# Altium PCB Tube_Driver.PcbDoc (part 1 of 2)
Units mm, origin at the board's own origin, x right, y up, seen from the top; angles counter-clockwise.
Board outline 113 x 87.5 mm, 2 copper layers (Top Layer, Bottom Layer); 135 components, 76 nets, 317 pads, 176 vias.
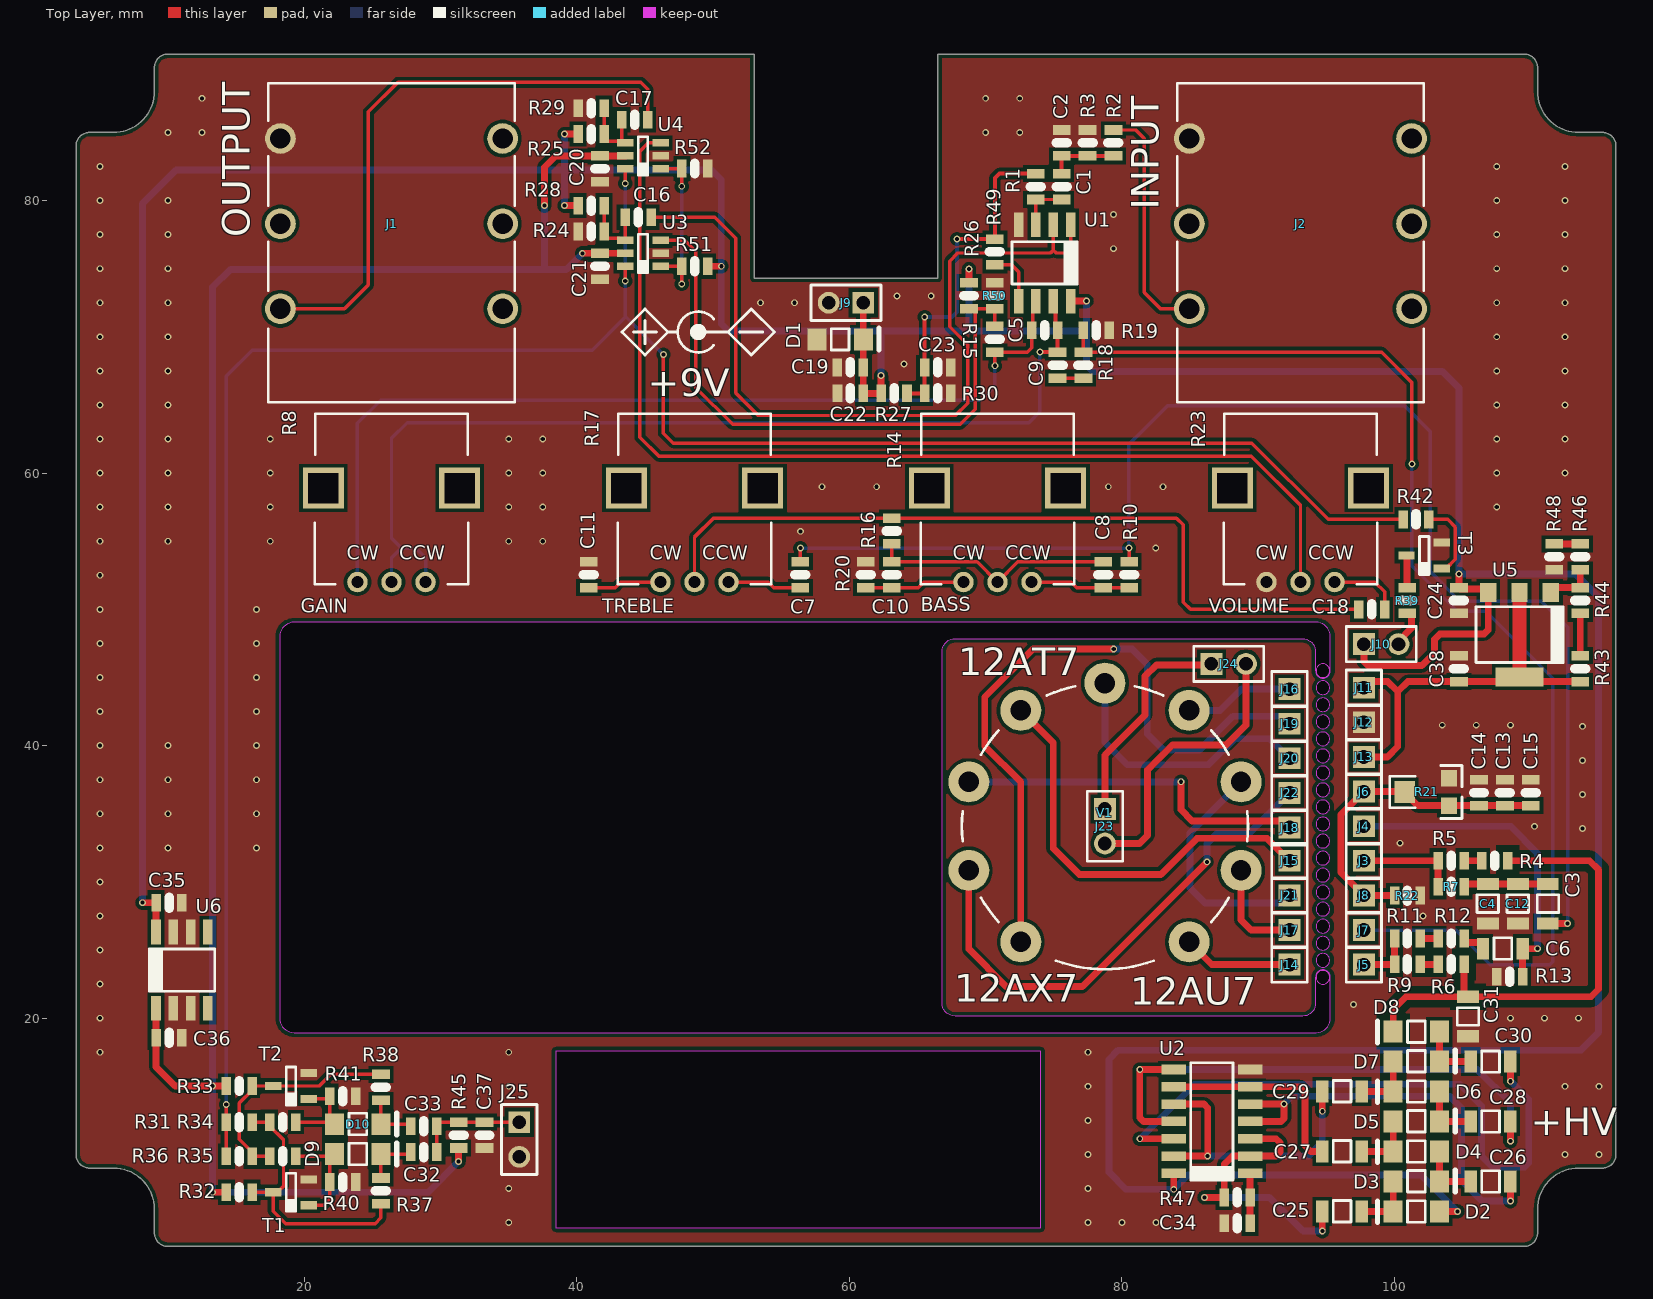
[diagram p0: Top Layer view]
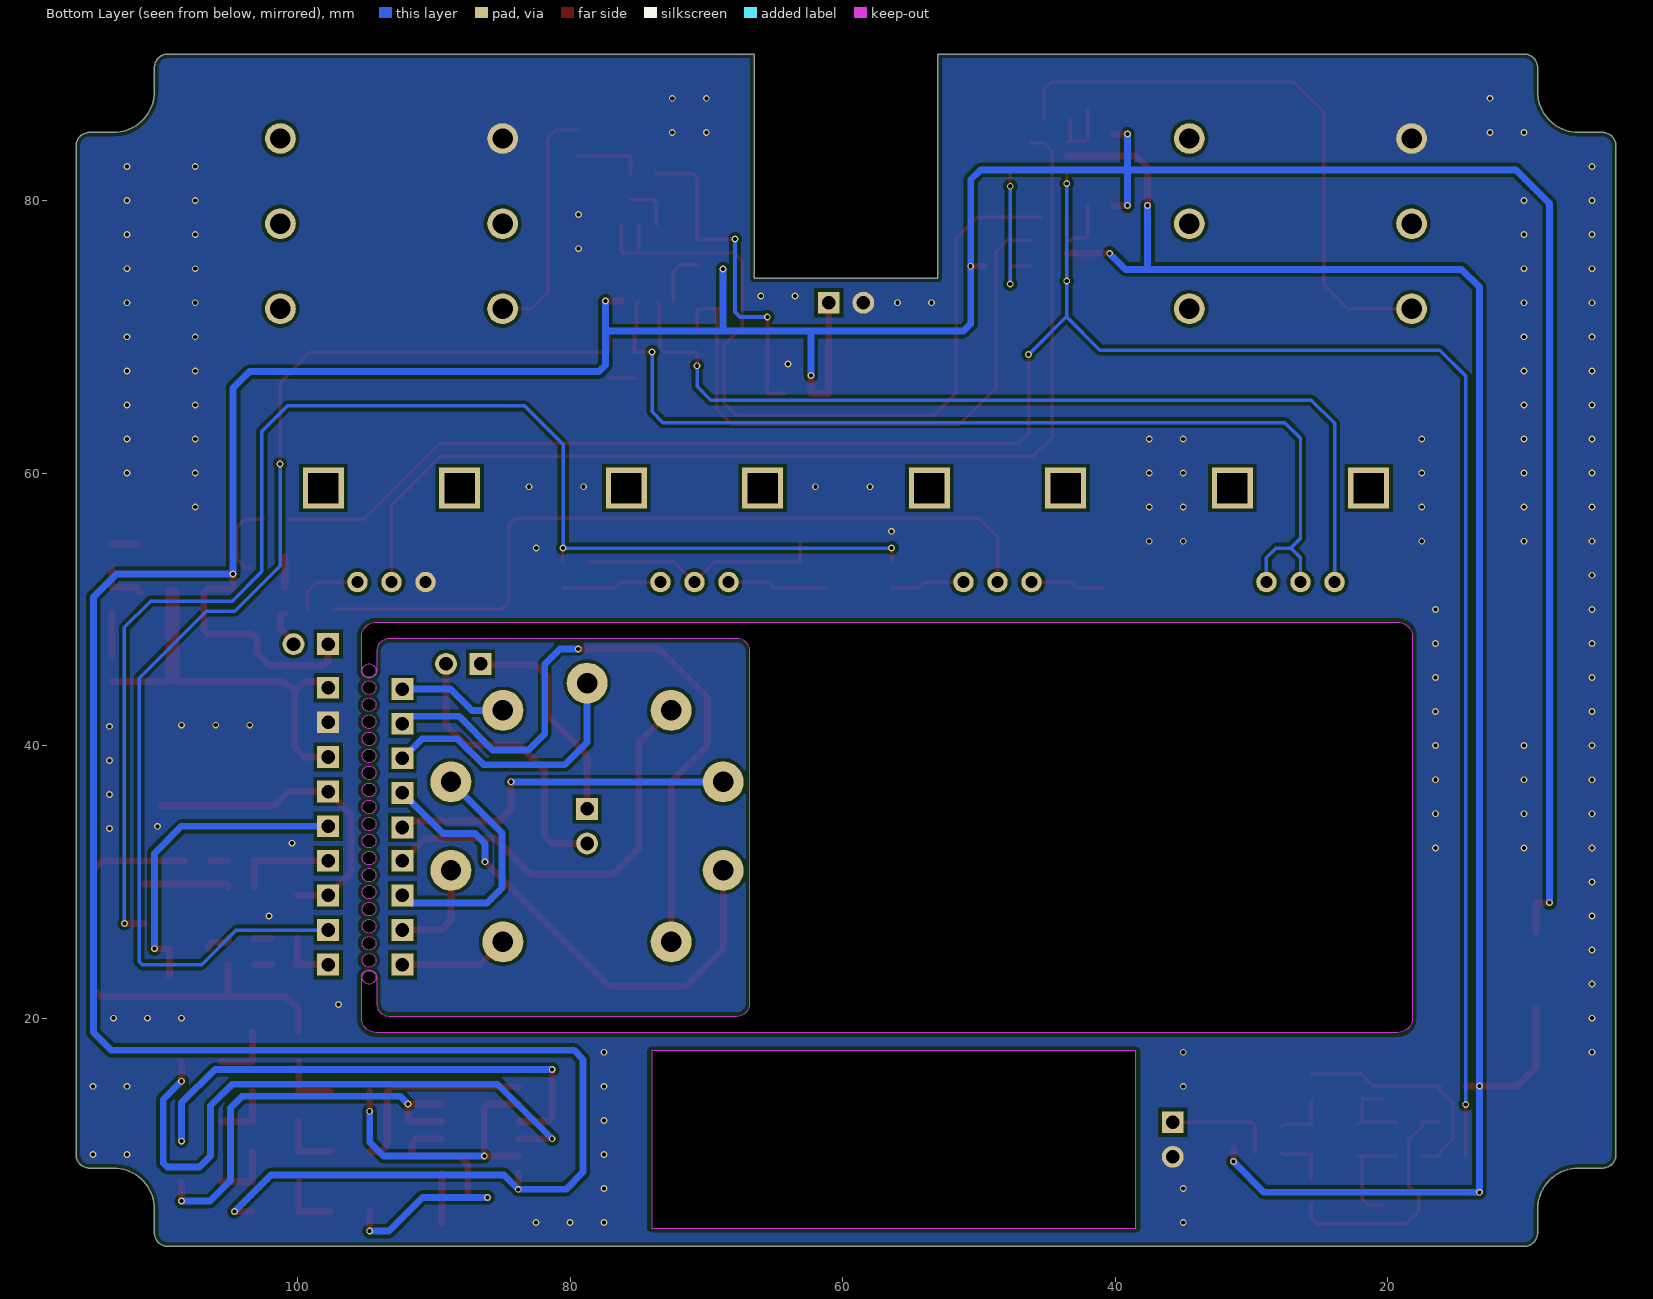
[diagram p1: Bottom Layer view, seen from below]

## Layer stack, top to bottom
Top Solder: solder mask 0.0102, Solder Resist, Dk 3.5
Top Layer: signal copper 0.0356
Dielectric 1: dielectric 0.32, FR-4, Dk 4.8
Bottom Layer: signal copper 0.0356
Bottom Solder: solder mask 0.0102, Solder Resist, Dk 3.5

## Board outline
4.25,8.999 6,9 cw(c6,6) 9,6 9,4.249 8.999,4.25 ccw(c9.999,4.25) 9.999,3.25 109.501,3.25 ccw(c109.501,4.25) 110.501,4.25 110.5,4.249 110.5,6 cw(c113.5,6) 113.5,9 115.251,9 115.25,8.999 ccw(c115.25,9.999) 116.25,9.999 116.25,84.001 ccw(c115.25,84.001) 115.25,85.001 115.251,85 113.5,85 cw(c113.5,88) 110.5,88 110.5,89.751 110.501,89.75 ccw(c109.501,89.75) 109.501,90.75 66.5,90.75 66.5,74.3 53,74.3 53,90.75 9.999,90.75 ccw(c9.999,89.75) 8.999,89.75 9,89.751 9,88 cw(c6,88) 6,85 4.249,85 4.25,85.001 ccw(c4.25,84.001) 3.25,84.001 3.25,9.999 ccw(c4.25,9.999)
cut-out: 18.2,19.999 ccw(c19.25,19.999) 19.25,18.949 19.251,18.949 94.25,18.949 ccw(c94.25,19.999) 95.3,19.999 95.3,23 ccw(c94.75,23) 94.75,23.55 ccw(c94.75,23) 94.2,23.001 94.2,23 94.2,21.1 cw(c93.25,21.1) 93.25,20.15 67.75,20.15 cw(c67.75,21.1) 66.8,21.1 66.8,46.9 cw(c67.75,46.9) 67.74,47.85 67.75,47.849 93.25,47.849 cw(c93.25,46.899) 94.2,46.899 94.2,45.5 94.2,45.499 ccw(c94.75,45.5) 94.75,44.95 ccw(c94.75,45.5) 95.296,45.429 95.3,45.45 95.3,47.999 ccw(c94.25,47.999) 94.25,49.049 19.25,49.049 19.249,49.049 ccw(c19.25,47.999) 18.2,47.999
cut-out: 94.25,23 ccw(c94.75,23) 94.75,22.5 ccw(c94.75,23) 95.25,23 ccw(c94.75,23) 94.75,23.5 ccw(c94.75,23)
cut-out: 94.25,24.25 ccw(c94.75,24.25) 94.75,23.75 ccw(c94.75,24.25) 95.25,24.25 ccw(c94.75,24.25) 94.75,24.75 ccw(c94.75,24.25)
cut-out: 94.25,25.5 ccw(c94.75,25.5) 94.75,25 ccw(c94.75,25.5) 95.25,25.5 ccw(c94.75,25.5) 94.75,26 ccw(c94.75,25.5)
cut-out: 94.25,26.75 ccw(c94.75,26.75) 94.75,26.25 ccw(c94.75,26.75) 95.25,26.75 ccw(c94.75,26.75) 94.75,27.25 ccw(c94.75,26.75)
cut-out: 94.25,28 ccw(c94.75,28) 94.75,27.5 ccw(c94.75,28) 95.25,28 ccw(c94.75,28) 94.75,28.5 ccw(c94.75,28)
cut-out: 94.25,29.25 ccw(c94.75,29.25) 94.75,28.75 ccw(c94.75,29.25) 95.25,29.25 ccw(c94.75,29.25) 94.75,29.75 ccw(c94.75,29.25)
cut-out: 94.25,31.75 ccw(c94.75,31.75) 94.75,31.25 ccw(c94.75,31.75) 95.25,31.75 ccw(c94.75,31.75) 94.75,32.25 ccw(c94.75,31.75)
cut-out: 94.25,33 ccw(c94.75,33) 94.75,32.5 ccw(c94.75,33) 95.25,33 ccw(c94.75,33) 94.75,33.5 ccw(c94.75,33)
cut-out: 94.25,34.25 ccw(c94.75,34.25) 94.75,33.75 ccw(c94.75,34.25) 95.25,34.25 ccw(c94.75,34.25) 94.75,34.75 ccw(c94.75,34.25)
cut-out: 94.25,35.5 ccw(c94.75,35.5) 94.75,35 ccw(c94.75,35.5) 95.25,35.5 ccw(c94.75,35.5) 94.75,36 ccw(c94.75,35.5)
cut-out: 94.25,36.75 ccw(c94.75,36.75) 94.75,36.25 ccw(c94.75,36.75) 95.25,36.75 ccw(c94.75,36.75) 94.75,37.25 ccw(c94.75,36.75)
cut-out: 94.25,38 ccw(c94.75,38) 94.75,37.5 ccw(c94.75,38) 95.25,38 ccw(c94.75,38) 94.75,38.5 ccw(c94.75,38)
cut-out: 94.25,39.25 ccw(c94.75,39.25) 94.75,38.75 ccw(c94.75,39.25) 95.25,39.25 ccw(c94.75,39.25) 94.75,39.75 ccw(c94.75,39.25)
cut-out: 94.25,40.5 ccw(c94.75,40.5) 94.75,40 ccw(c94.75,40.5) 95.25,40.5 ccw(c94.75,40.5) 94.75,41 ccw(c94.75,40.5)
cut-out: 94.25,41.75 ccw(c94.75,41.75) 94.75,41.25 ccw(c94.75,41.75) 95.25,41.75 ccw(c94.75,41.75) 94.75,42.25 ccw(c94.75,41.75)
cut-out: 94.25,43 ccw(c94.75,43) 94.75,42.5 ccw(c94.75,43) 95.25,43 ccw(c94.75,43) 94.75,43.5 ccw(c94.75,43)
cut-out: 94.25,44.25 ccw(c94.75,44.25) 94.75,43.75 ccw(c94.75,44.25) 95.25,44.25 ccw(c94.75,44.25) 94.75,44.75 ccw(c94.75,44.25)
cut-out: 94.25,45.5 ccw(c94.75,45.5) 94.75,45 ccw(c94.75,45.5) 95.25,45.5 ccw(c94.75,45.5) 94.75,46 ccw(c94.75,45.5)
cut-out: 94.25,30.5 ccw(c94.75,30.5) 94.75,30 ccw(c94.75,30.5) 95.25,30.5 ccw(c94.75,30.5) 94.75,31 ccw(c94.75,30.5)
cut-out: 38.48,4.6 38.48,17.6 74.02,17.6 74.02,4.6

## Design rules (kind name [scope] priority, off if disabled: settings)
BoardOutlineClearance [All] p1: gap=0.3 ignorepadtopadclearanceinfootprint=FALSE
Clearance HV [InNet('+HV')] p1: gap=0.5 ignorepadtopadclearanceinfootprint=FALSE
Clearance [All] p2: gap=0.254 ignorepadtopadclearanceinfootprint=FALSE except(0: Arc-Hole Track-Hole SMDPad-Hole THPad-Hole Via-Hole Fill-Hole Poly-Hole Region-Hole Text-Hole)
ComponentClearance [All] p1: gap=0 collisioncheckmode=3 verticalgap=0 showdistances=FALSE
Height [All] p1: minheight=0 maxheight=100 prefheight=12.7
HoleSize [All] p1: absolutevalues=TRUE maxlimit=10 minlimit=0.025 maxpercent=80.000 minpercent=20.000
MinimumSolderMaskSliver [All] p1: minsoldermaskwidth=0.15
PolygonConnect [All] p1: connectstyle=Direct reliefconductorwidth=0.254 reliefentries=4 polygonreliefangle="90 Angle" airgapwidth=0.254
RoutingVias [All] p1: holewidth=0.3 width=0.5 viastyle="Through Hole" minholewidth=0.3 minwidth=0.5 maxholewidth=0.3 maxwidth=0.5
SilkToSilkClearance [All] p1: silktosilkclearance=0.15
SilkToSolderMaskClearance [IsPad] p1: minsilkscreentomaskgap=0.15 clearancetoexposedcopper=TRUE
SolderMaskExpansion [All] p1: expansion=0.102 istentingtop=FALSE
Width Voltage [InNet('+4V5')] p1: maxlimit=1 minlimit=0.254 preferedwidth=0.3
Width [All] p2: maxlimit=10 minlimit=0.127 preferedwidth=0.254
24 further rules are at their usual default settings.

## Components (designator, comment, footprint, x,y, rotation, side; value= is the part's Value field where it differs from the comment)
C1 "47n" "CAPACITOR 0805" 75.575,81.025 r270 top
C2 "47p" "CAPACITOR 0805" 75.575,84.225 r270 top
C3 "1u" "CAPACITOR 1206" 111.25,28.4 r270 top
C4 "47n" "CAPACITOR 1206" 106.85,28.4 r90 top
C5 "47p" "CAPACITOR 0805" 74.325,70.475 r180 top
C6 "47n" "CAPACITOR 1206" 107.95,25.1 r0 top
C7 "1n" "CAPACITOR 0805" 56.4,52.55 r90 top
C8 "1n" "CAPACITOR 0805" 78.625,52.55 r270 top
C9 "33n" "CAPACITOR 0805" 75.275,67.925 r270 top
C10 "4.7n" "CAPACITOR 0805" 63.1,52.55 r90 top
C11 "10n" "CAPACITOR 0805" 40.875,52.55 r270 top
C12 "47n" "CAPACITOR 1206" 109.05,28.4 r90 top
C13 "10u" "CAPACITOR 0805" 108.1,36.55 r270 top
C14 "1u" "CAPACITOR 0805" 106.2,36.55 r270 top
C15 "10u" "CAPACITOR 0805" 110,36.55 r270 top
C16 "4.7u" "CAPACITOR 0805" 44.5,78.775 r180 top
C17 "4.7u" "CAPACITOR 0805" 44.25,85.925 r0 top
C18 "10u" "CAPACITOR 0805" 98.321,49.994 r180 top
C19 "10u" "CAPACITOR 0805" 60.07,67.75 r0 top
C20 "100n" "CAPACITOR 0805" 41.7,82.325 r90 top
C21 "100n" "CAPACITOR 0805" 41.7,75.175 r90 top
C22 "10u" "CAPACITOR 0805" 60.075,65.85 r0 top
C23 "10u" "CAPACITOR 0805" 66.475,67.75 r180 top
C24 "10u" "CAPACITOR 0805" 104.725,50.65 r90 top
C25 "47n" "CAPACITOR 1206" 96.15,5.825 r0 top
C26 "47n" "CAPACITOR 1206" 107.05,8.025 r180 top
C27 "47n" "CAPACITOR 1206" 96.15,10.225 r0 top
C28 "47n" "CAPACITOR 1206" 107.05,12.425 r180 top
C29 "47n" "CAPACITOR 1206" 96.15,14.625 r0 top
C30 "47n" "CAPACITOR 1206" 107.05,16.825 r180 top
C31 "47n" "CAPACITOR 1206" 105.4,20.125 r90 top
C32 "1n" "CAPACITOR 0805" 28.775,10.175 r0 top
C33 "1n" "CAPACITOR 0805" 28.775,12.075 r180 top
C34 "1n" "CAPACITOR 0805" 88.45,4.95 r0 top
C35 "4.7u" "CAPACITOR 0805" 10.075,28.475 r180 top
C36 "4.7u" "CAPACITOR 0805" 10.075,18.575 r180 top
C37 "220n" "CAPACITOR 0805" 33.225,11.425 r90 top
C38 "10u" "CAPACITOR 0805" 104.725,45.65 r270 top
D1 "ZMD12" "DIODE SOD-80 DO-231AA" 59.32,69.8 r0 top
D2 "LS4148" "DIODE SOD-80 DO-231AA" 101.6,5.825 r180 top
D3 "LS4148" "DIODE SOD-80 DO-231AA" 101.6,8.025 r0 top
D4 "LS4148" "DIODE SOD-80 DO-231AA" 101.6,10.225 r180 top
D5 "LS4148" "DIODE SOD-80 DO-231AA" 101.6,12.425 r0 top
D6 "LS4148" "DIODE SOD-80 DO-231AA" 101.6,14.625 r180 top
D7 "LS4148" "DIODE SOD-80 DO-231AA" 101.6,16.825 r0 top
D8 "LS4148" "DIODE SOD-80 DO-231AA" 101.6,19.025 r180 top
D9 "LS4148" "DIODE SOD-80 DO-231AA" 23.925,10.025 r0 top
D10 "LS4148" "DIODE SOD-80 DO-231AA" 23.925,12.225 r0 top
J1 "ACJM-IH" "AMPHENOL ACJM-MHDR" 26.4,78.3 r0 top locked
J2 "ACJM-IH" "AMPHENOL ACJM-MHDR" 93.1,78.3 r0 top locked
J3 "901200761" "MECHANICAL PINHEADER 1P 2.54MM MALE" 97.75,31.55 r90 top locked
J4 "901200761" "MECHANICAL PINHEADER 1P 2.54MM MALE" 97.75,34.09 r90 top locked
J5 "901200761" "MECHANICAL PINHEADER 1P 2.54MM MALE" 97.75,23.93 r90 top locked
J6 "901200761" "MECHANICAL PINHEADER 1P 2.54MM MALE" 97.75,36.63 r90 top locked
J7 "901200761" "MECHANICAL PINHEADER 1P 2.54MM MALE" 97.75,26.47 r90 top locked
J8 "901200761" "MECHANICAL PINHEADER 1P 2.54MM MALE" 97.75,29.01 r90 top locked
J9 "901200762" "MECHANICAL PINHEADER 2P 2.54MM MALE" 59.75,72.5 r180 top locked
J10 "901200762" "MECHANICAL PINHEADER 2P 2.54MM MALE" 99.02,47.45 r0 top
J11 "901200761" "MECHANICAL PINHEADER 1P 2.54MM MALE" 97.75,44.25 r90 top locked
J12 "901200761" "MECHANICAL PINHEADER 1P 2.54MM MALE" 97.75,41.71 r90 top locked
J13 "901200761" "MECHANICAL PINHEADER 1P 2.54MM MALE" 97.75,39.17 r90 top locked
J14 "901200761" "MECHANICAL PINHEADER 1P 2.54MM MALE" 92.3,23.93 r90 top locked
J15 "901200761" "MECHANICAL PINHEADER 1P 2.54MM MALE" 92.3,31.55 r90 top locked
J16 "901200761" "MECHANICAL PINHEADER 1P 2.54MM MALE" 92.3,44.15 r90 top locked
J17 "901200761" "MECHANICAL PINHEADER 1P 2.54MM MALE" 92.3,26.47 r90 top locked
J18 "901200761" "MECHANICAL PINHEADER 1P 2.54MM MALE" 92.3,33.99 r90 top locked
J19 "901200761" "MECHANICAL PINHEADER 1P 2.54MM MALE" 92.3,41.61 r90 top locked
J20 "901200761" "MECHANICAL PINHEADER 1P 2.54MM MALE" 92.3,39.07 r90 top locked
J21 "901200761" "MECHANICAL PINHEADER 1P 2.54MM MALE" 92.3,29.01 r90 top locked
J22 "901200761" "MECHANICAL PINHEADER 1P 2.54MM MALE" 92.3,36.53 r90 top locked
J23 "901200762" "MECHANICAL PINHEADER 2P 2.54MM MALE" 78.75,34.09 r270 top locked
J24 "901200762" "MECHANICAL PINHEADER 2P 2.54MM MALE" 87.83,46 r0 top locked
J25 "901200762" "MECHANICAL PINHEADER 2P 2.54MM MALE" 35.775,11.1 r270 top
R1 "470k" "RESISTOR 0805" 73.675,81.025 r90 top
R2 "10k" "RESISTOR 0805" 79.375,84.225 r270 top
R3 "1M" "RESISTOR 0805" 77.475,84.225 r90 top
R4 "12k" "RESISTOR 0805" 107.35,31.55 r0 top
R5 "33k" "RESISTOR 0805" 104.15,31.55 r0 top
R6 "12k" "RESISTOR 0805" 104.15,23.95 r0 top
R7 "1k" "RESISTOR 0805" 104.15,29.65 r0 top
R8 "100k" "POTENTIOMETER PTV09A" 26.4,59 r0 top locked
R9 "33k" "RESISTOR 0805" 100.95,23.95 r0 top
R10 "100k" "RESISTOR 0805" 80.525,52.55 r90 top
R11 "4k7" "RESISTOR 0805" 100.95,25.85 r0 top
R12 "4k7" "RESISTOR 0805" 104.15,25.85 r0 top
R13 "22k" "RESISTOR 0805" 108.45,23.05 r0 top
R14 "100k" "POTENTIOMETER PTV09A" 70.867,59 r0 top locked
R15 "220R" "RESISTOR 0805" 70.675,69.825 r270 top
R16 "22k" "RESISTOR 0805" 63.1,55.75 r90 top
R17 "100k" "POTENTIOMETER PTV09A" 48.633,59 r0 top locked
R18 "10k" "RESISTOR 0805" 77.175,67.925 r90 top
R19 "10k" "RESISTOR 0805" 78.125,70.475 r180 top
R20 "10k" "RESISTOR 0805" 61.2,52.55 r270 top
R21 "10k" "Potentiometer 3x3.5x1.55mm" 102.2,36.6 r90 top
R22 "47k" "RESISTOR 0805" 100.95,29 r180 top
R23 "100k" "POTENTIOMETER PTV09A" 93.1,59 r0 top locked
R24 "22k" "RESISTOR 0805" 41.05,77.725 r0 top
R25 "22k" "RESISTOR 0805" 41.05,84.875 r180 top
R26 "22k" "RESISTOR 0805" 68.775,73.025 r90 top
R27 "22k" "RESISTOR 0805" 63.275,65.85 r180 top
R28 "22k" "RESISTOR 0805" 41.05,79.625 r180 top
R29 "22k" "RESISTOR 0805" 41.05,86.775 r0 top
R30 "22k" "RESISTOR 0805" 66.475,65.85 r180 top
R31 "10k" "RESISTOR 0805" 15.225,12.375 r180 top
R32 "3k9" "RESISTOR 0805" 15.225,7.225 r180 top
R33 "3k9" "RESISTOR 0805" 15.225,15.025 r180 top
R34 "47k" "RESISTOR 0805" 18.425,12.375 r0 top
R35 "47k" "RESISTOR 0805" 18.425,9.875 r180 top
R36 "10k" "RESISTOR 0805" 15.225,9.875 r180 top
R37 "220k" "RESISTOR 0805" 25.625,7.325 r270 top
R38 "220k" "RESISTOR 0805" 25.625,14.925 r90 top
R39 "680R" "RESISTOR 0805" 100.925,50.65 r270 top
R40 "100k" "RESISTOR 0805" 22.825,7.975 r180 top
R41 "100k" "RESISTOR 0805" 22.825,14.275 r180 top
R42 "47k" "RESISTOR 0805" 101.575,56.6 r0 top
R43 "10R" "RESISTOR 0805" 113.625,45.65 r270 top
R44 "100R" "RESISTOR 0805" 113.625,50.65 r270 top
R45 "100k" "RESISTOR 0805" 31.325,11.425 r270 top
R46 "220R" "RESISTOR 0805" 113.625,53.85 r270 top
R47 "2k7" "RESISTOR 0805" 88.45,6.85 r180 top
R48 "220R" "RESISTOR 0805" 111.725,53.85 r90 top
R49 "100R" "RESISTOR 0805" 70.675,76.225 r270 top
R50 "22k" "RESISTOR 0805" 70.675,73.025 r270 top
R51 "22k" "RESISTOR 0805" 48.65,75.175 r0 top
R52 "22k" "RESISTOR 0805" 48.65,82.35 r180 top
T1 "BC847B" SOT23-3 19.025,7.225 r90 top
T2 "BC847B" SOT23-3 19.025,15.025 r90 top
T3 "BC847B" SOT23-3 102.175,53.95 r90 top
U1 "LM833" SOIC-8 74.325,75.425 r180 top
U2 "40106B" SOIC-14 86.6,12.425 r90 top value=LM833
U3 "SN74LVC1G3157" SOT23-6 44.85,76.125 r90 top
U4 "SN74LVC1G3157" SOT23-6 44.85,83.275 r90 top
U5 "1117" SOT223 109.175,48.15 r180 top
U6 "L78L05" SOIC-8 11.025,23.525 r0 top
V1 "12AX7" "TUbe 9pin NOVAL" 78.75,34.09 r0 top locked

## Footprints (in the part's own frame and the unit in brackets; to place one, negate y for a bottom-side part, rotate by r counter-clockwise, add the part's x,y. Pads: shape width x height; smd on the part's side, far side on the other; paste and mask are expansions set on the pad)
"AMPHENOL ACJM-MHDR" [mm]
  round 2.25 hole 1.5: 1(-8.15,6.25) 2(-8.15,0) 3(-8.15,-6.25) 4(8.15,-6.25) 5(8.15,0) 6(8.15,6.25)
  silkscreen extent -9.05,-13.1 9.05,10.3, body extent -9.1,-13.13 9.1,18.66, height 16.3
"CAPACITOR 0805" [mm]
  rect 0.7x1.3 smd: 1(-0.95,0) 2(0.95,0)
  silkscreen extent 0,-0.4 0,0.4, body extent -1,-0.63 1,0.63, height 0.6
"CAPACITOR 1206" [mm]
  rect 0.9x1.6 smd: 1(-1.45,0) 2(1.45,0)
  silkscreen extent -0.65,-0.77 0.65,0.8, body extent -1.6,-0.8 1.6,0.8, height 0.79
"DIODE SOD-80 DO-231AA" [mm]
  rect 1.4x1.6 smd: 1(-1.7,0) 2(1.7,0)
  silkscreen extent -0.65,-0.77 2.85,0.81, body extent -1.82,-0.8 1.88,0.8, height 1.55
"MECHANICAL PINHEADER 1P 2.54MM MALE" [mm]
  rect 1.6x1.6 hole 1: 1(0,0)
  silkscreen extent -1.3,-1.3 1.3,1.3, body extent -1.35,-1.35 1.35,1.35, height 8.6
"MECHANICAL PINHEADER 2P 2.54MM MALE" [mm]
  rect 1.6x1.6 hole 1: 1(-1.27,0)
  round 1.6 hole 1: 2(1.27,0)
  silkscreen extent -2.57,-1.3 2.57,1.3, body extent -2.62,-1.35 2.62,1.35, height 8.6
"Potentiometer 3x3.5x1.55mm" [mm]
  rect 1.2x1.2 smd: 1(-1,-1.8) 3(1,-1.8)
  rect 1.6x1.5 smd: 2(0,1.45)
  silkscreen extent -1.95,-2.75 1.95,2.55, body extent -1.8,-1.91 1.8,2.05, height 1.13
"POTENTIOMETER PTV09A" [mm]
  round 1.5 hole 0.9: 1(-2.5,-7) 2(0,-7) 3(2.5,-7)
  rect 3x3 hole 2.2 square unplated: ""(-5,-0.1) ""(5,-0.1)
  silkscreen extent -5.63,-7.15 5.63,5.35, body extent -5.64,-7.2 5.66,5.4, height 31.14
"RESISTOR 0805" [mm]
  rect 0.7x1.3 smd: 1(-0.95,0) 2(0.95,0)
  silkscreen extent 0,-0.4 0,0.4, body extent -1,-0.63 1,0.63, height 0.6
SOIC-8 [mm]
  rect 0.7x1.8 smd: 1(-1.905,-2.8) 2(-0.635,-2.8) 3(0.635,-2.8) 4(1.905,-2.8) 5(1.905,2.8) 6(0.635,2.8) 7(-0.635,2.8) 8(-1.905,2.8)
  silkscreen extent -2.4,-1.55 2.4,1.55, body extent -2.45,-3 2.45,3, height 1.75
SOIC-14 [mm]
  rect 0.7x1.8 smd: 1(-3.81,-2.8) 2(-2.54,-2.8) 3(-1.27,-2.8) 4(0,-2.8) 5(1.27,-2.8) 6(2.54,-2.8) 7(3.81,-2.8) 8(3.81,2.8) 9(2.54,2.8) 10(1.27,2.8) 11(0,2.8) 12(-1.27,2.8) 13(-2.54,2.8) 14(-3.81,2.8)
  silkscreen extent -4.31,-1.55 4.31,1.55, body extent -4.37,-3 4.38,3, height 1.75
SOT23-3 [mm]
  rect 0.6x1.2 smd: 1(-0.95,-1.3) 2(0.95,-1.3) 3(0,1.3)
  silkscreen extent -1.4,-0.35 1.4,0.35, body extent -1.45,-1.4 1.45,1.4, height 1.3
SOT23-6 [mm]
  rect 0.55x1.2 smd: 1(-0.95,-1.3) 2(0,-1.3) 3(0.95,-1.3) 4(0.95,1.3) 5(0,1.3) 6(-0.95,1.3)
  silkscreen extent -1.4,-0.35 1.4,0.35, body extent -1.45,-1.4 1.45,1.4, height 1.45
SOT223 [mm]
  rect 1.2x1.4 smd: 1(-2.3,-3.1) 2(0,-3.1) 3(2.3,-3.1)
  rect 3.5x1.4 smd: 4(0,3.1)
  silkscreen extent -3.2,-2.05 3.2,2.05, body extent -3.25,-3.48 3.25,3.48, height 1.65
"TUbe 9pin NOVAL" [mm]
  round 3 hole 1.5: 1(6.172,-8.495) 2(9.986,-3.245) 3(9.986,3.245) 4(6.172,8.495) 5(0,10.5) 6(-6.172,8.495) 7(-9.986,3.245) 8(-9.986,-3.245) 9(-6.172,-8.495)
  silkscreen extent -10.5,-10.5 10.5,10.27, body extent -11,-11 11,11, height 62.4

## Part data
C1: library part "Capacitor 47n 0805 ±10% SMD E6", "Capacitor: ceramic; MLCC; 47nF; 50V; X7R; ±10%; SMD; 0805", Dielectric=X7R, Manufacturer=YAGEO, Manufacturer Part Number=CC0805KRX7R9BB473, Supplier Part Number=CC0805KRX7R9473, Tolerance=±10%, Voltage max=50V, ComponentLink1Description=Datasheet, ComponentLink1URL=https://www.tme.eu/Document/04f8372e9ba78fa4699feb147e4488d1/UPY-GP_NP0_16V-to-50V_18.pdf, Supplier=TME, Type="Ceramic Capacitor"
C2 C5: library part "Capacitor 47p 0805 ±5% SMD E6", "Capacitor: ceramic; MLCC; 47pF; 50V; C0G (NP0); ±5%; SMD; 0805", Dielectric="C0G (NP0)", Manufacturer=YAGEO, Manufacturer Part Number=CC0805JRNPO9BN470, Supplier Part Number=CC0805JRNPO9470, Tolerance=±5%, Voltage max=50V, ComponentLink1Description=Datasheet, ComponentLink1URL=https://www.tme.eu/Document/04f8372e9ba78fa4699feb147e4488d1/UPY-GP_NP0_16V-to-50V_18.pdf, Supplier=TME, Type="Ceramic Capacitor"
C3: library part "Capacitor 1u 1206 ±5% SMD E6", "Capacitor: ceramic; MLCC; 1uF; 100V; X7R; ±10%; SMD; 1206", Dielectric=X7R, Manufacturer=WALSIN, Manufacturer Part Number=1206B105K101CT, Tolerance=±10%, Voltage max=100V, ComponentLink1Description=Datasheet, ComponentLink1URL=https://www.tme.eu/Document/e45476bf270793f696988c4e93ce1237/ASC_General_Purpose.pdf, Supplier=TME, Supplier Part Number=1206B105K101CT, Type="Ceramic Capacitor"
C4 C6 C12 C25 C26 C27 C28 C29 C30 C31: library part "Capacitor 47n 1206 ±10% SMD E6", "Capacitor: ceramic; MLCC; 47nF; 100V; X7R; ±10%; SMD; 1206", Dielectric=X7R, Manufacturer=YAGEO, Manufacturer Part Number=CC1206KRX7R0BB473, Tolerance=±10%, Voltage max=100V, ComponentLink1Description=Datasheet, ComponentLink1URL=https://www.tme.eu/Document/fbb9415081fcefba62c0f8bbf5b21210/UPY-GPHC_X7R_6.3V-to-50V_20.pdf, Supplier=TME, Supplier Part Number=CC1206KRX7R0BB473, Type="Ceramic Capacitor"
C7 C8 C32 C33 C34: library part "Capacitor 1n 0805 ±10% SMD E6", "Capacitor: ceramic; MLCC; 1nF; 50V; X7R; ±10%; SMD; 0805", Dielectric=X7R, Manufacturer=YAGEO, Manufacturer Part Number=CC0805KRX7R9BB102, Supplier Part Number=CC0805KRX7R9102, Tolerance=±10%, Voltage max=50V, ComponentLink1Description=Datasheet, ComponentLink1URL=https://www.tme.eu/Document/04f8372e9ba78fa4699feb147e4488d1/UPY-GP_NP0_16V-to-50V_18.pdf, Supplier=TME, Type="Ceramic Capacitor"
C9: library part "Capacitor 33n 0805 ±10% SMD E6", "Capacitor: ceramic; MLCC; 33nF; 50V; X7R; ±10%; SMD; 0805", Dielectric=X7R, Manufacturer=YAGEO, Manufacturer Part Number=CC0805KRX7R9BB333, Supplier Part Number=CC0805KRX7R9333, Tolerance=±10%, Voltage max=50V, ComponentLink1Description=Datasheet, ComponentLink1URL=https://www.tme.eu/Document/04f8372e9ba78fa4699feb147e4488d1/UPY-GP_NP0_16V-to-50V_18.pdf, Supplier=TME, Type="Ceramic Capacitor"
C10: library part "Capacitor 4n7 0805 ±10% SMD E6", "Capacitor: ceramic; MLCC; 4.7nF; 50V; X7R; ±10%; SMD; 0805", Dielectric=X7R, Manufacturer=YAGEO, Manufacturer Part Number=CC0805KRX7R9BB472, Supplier Part Number=CC0805KRX7R9472, Tolerance=±10%, Voltage max=50V, ComponentLink1Description=Datasheet, ComponentLink1URL=https://www.tme.eu/Document/04f8372e9ba78fa4699feb147e4488d1/UPY-GP_NP0_16V-to-50V_18.pdf, Supplier=TME, Type="Ceramic Capacitor"
C11: library part "Capacitor 10n 0805 ±10% SMD E6", "Capacitor: ceramic; MLCC; 10nF; 50V; X7R; ±10%; SMD; 0805", Dielectric=X7R, Manufacturer=YAGEO, Manufacturer Part Number=CC0805KRX7R9BB103, Supplier Part Number=CC0805KRX7R9103, Tolerance=±10%, Voltage max=50V, ComponentLink1Description=Datasheet, ComponentLink1URL=https://www.tme.eu/Document/04f8372e9ba78fa4699feb147e4488d1/UPY-GP_NP0_16V-to-50V_18.pdf, Supplier=TME, Type="Ceramic Capacitor"
C13 C15 C18 C19 C22 C23 C24 C38: library part "Capacitor 10u 0805 ±10% SMD E3", "Capacitor: ceramic; MLCC; 10uF; 25V; X5R; ±10%; SMD; 0805", Dielectric=X5R, Manufacturer=MURATA, Manufacturer Part Number=GRJ21BR61E106KE01K, Tolerance=±10%, Voltage max=25V, ComponentLink1Description=Datasheet, ComponentLink1URL=https://www.tme.eu/Document/58bb7db4269ac3ad53d1aa3c0ade9bab/GRM.pdf, Supplier=TME, Supplier Part Number=GRJ21BR61E106KE01K, Type="Ceramic Capacitor"
C14: library part "Capacitor 1u 0805 ±10% SMD E3", "Capacitor: ceramic; MLCC; 1uF; 16V; X7R; ±10%; SMD; 0805", Dielectric=X7R, Manufacturer=YAGEO, Manufacturer Part Number=CC0805KKX7R7BB105, Supplier Part Number=CC0805KKX7R7105, Tolerance=±10%, Voltage max=16V, ComponentLink1Description=Datasheet, ComponentLink1URL=https://www.tme.eu/Document/071099429b2f0d2eb6856bd75496057a/CC0603KRX7R9BB1228324192.pdf, Supplier=TME, Type="Ceramic Capacitor"
C16 C17 C35 C36: library part "Capacitor 4u7 0805 ±10% SMD E3", "Capacitor: ceramic; MLCC; 4.7uF; 16V; X7R; ±10%; SMD; 0805", Dielectric=X7R, Manufacturer=YAGEO, Manufacturer Part Number=CC0805KKX7R7BB475, Tolerance=±10%, Voltage max=16V, ComponentLink1Description=Datasheet, ComponentLink1URL=https://www.tme.eu/Document/071099429b2f0d2eb6856bd75496057a/CC0603KRX7R9BB1228324192.pdf, Supplier=TME, Supplier Part Number=CC0805KKX7R7BB475, Type="Ceramic Capacitor"
C20 C21: library part "Capacitor 100n 0805 ±10% SMD E6", "Capacitor: ceramic; MLCC; 100nF; 50V; X7R; ±10%; SMD; 0805", Dielectric=X7R, Manufacturer=YAGEO, Manufacturer Part Number=CC0805KRX7R9BB104, Supplier Part Number=CC0805KRX7R9104, Tolerance=±10%, Voltage max=50V, ComponentLink1Description=Datasheet, ComponentLink1URL=https://www.tme.eu/Document/04f8372e9ba78fa4699feb147e4488d1/UPY-GP_NP0_16V-to-50V_18.pdf, Supplier=TME, Type="Ceramic Capacitor"
C37: library part "Capacitor 220n 0805 ±10% SMD E6", "Capacitor: ceramic; MLCC; 220nF; 50V; X7R; ±10%; SMD; 0805", Dielectric=X7R, Manufacturer=YAGEO, Manufacturer Part Number=CC0805KKX7R9BB224, Supplier Part Number=CC0805KKX7R9224, Tolerance=±10%, Voltage max=50V, ComponentLink1Description=Datasheet, ComponentLink1URL=https://www.tme.eu/Document/04f8372e9ba78fa4699feb147e4488d1/UPY-GP_NP0_16V-to-50V_18.pdf, Supplier=TME, Type="Ceramic Capacitor"
D1: library part "Diode 12V 1W SOD80 Zener ZMD12", "Diode: Zener; 1W; 12V; SMD; reel,tape; MiniMELF plastic", Forward Voltage=1V, Manufacturer="DIOTEC SEMICONDUCTOR", Power=1W, Reverse Voltage=12V, Supplier Part Number=ZMD12-DIO, ComponentLink1Description=Datasheet, ComponentLink1URL=https://www.tme.eu/Document/9a1c7317052d9f9e9799c606dfc1c6e5/ls4148.pdf, Manufacturer Part Number=ZMD12, Supplier=TME, Type="Zener Diode"
D2 D3 D4 D5 D6 D7 D8 D9 D10: library part "Diode 100V 0.15A SOD80 General Purpose LL4148", "Diode: switching; SMD; 100V; 0.15A; 4ns; MiniMELF quadro; Ufmax: 1V", Current=0.15A, Forward Voltage=1V, Manufacturer="DIOTEC SEMICONDUCTOR", Reverse Voltage=100V, Supplier Part Number=LS4148-DIO, ComponentLink1Description=Datasheet, Manufacturer Part Number=LS4148, Supplier=TME, Type="Switching Diode"
  D2 D3 D4 D5 D6 D7 D8: ComponentLink1URL=https://www.tme.eu/Document/9a1c7317052d9f9e9799c606dfc1c6e5/ls4148.pdf
  D9 D10: ComponentLink1URL=https://www.tme.eu/Document/666c7f44a829e216c7a9f68285ef4f7d/PYu-RC_Group_51_RoHS_L_11.pdf
J1 J2: library part "Mechanical Jack 6.3mm Socket PCB THT ACJM-MHDR", "Socket; Jack 6,3mm; female; mono,with double switch; ways: 2; THT", Manufacturer=AMPHENOL, ComponentLink1Description=Datasheet, ComponentLink1URL=https://www.tme.eu/Document/3b481b31b258de2c2d440deba99f1516/ACJM-IH.pdf, Manufacturer Part Number=ACJM-IH, Mounting=THT, Supplier=TME, Supplier Part Number=ACJM-IH, Type="Jack 6.3mm"
J3 J4 J5 J6 J7 J8 J11 J12 J13 J14 J15 J16 J17 J18 J19 J20 J21 J22: library part "Mechanical Pinheader Male 1pin P=2.54mm THT", "Pin header; pin strips; C-Grid III; male; PIN: 1; straight; 2.54mm", Current=3A, Manufacturer=MOLEX, Supplier Part Number=MX-90120-0761, ComponentLink1Description=Datasheet, ComponentLink1URL=https://www.tme.eu/Document/5abee1dba4fd2cbb64da0ee0ca93f477/MX-90120-0762.pdf, Manufacturer Part Number=901200761, Mounting=THT, Pitch="2.54 mm", Supplier=TME, Type="Pin Header"
J9 J10 J23 J24 J25: library part "Mechanical Pinheader Male 2pin P=2.54mm THT", "Pin header; pin strips; C-Grid III; male; PIN: 2; straight; 2.54mm", Current=3A, Manufacturer=MOLEX, Supplier Part Number=MX-90120-0762, ComponentLink1Description=Datasheet, Manufacturer Part Number=901200762, Mounting=THT, Pitch="2.54 mm", Supplier=TME, Type="Pin Header"
  J9 J25: ComponentLink1URL=https://www.tme.eu/Document/5abee1dba4fd2cbb64da0ee0ca93f477/MX-90120-0762.pdf
  J10 J23 J24: ComponentLink1URL=https://www.tme.eu/Document/9a1c7317052d9f9e9799c606dfc1c6e5/ls4148.pdf
R1: library part "Resistor 470k 0805 1% 0.125W SMD E12", "Resistor: thick film; SMD; 0805; 470kΩ; 0,125W; ±1%; -55÷155°C", Manufacturer=YAGEO, Manufacturer Part Number=RC0805FR-07470KL, Power=0.125W, Tolerance=1%, Voltage max=150V, ComponentLink1Description=Datasheet, ComponentLink1URL=https://www.tme.eu/Document/666c7f44a829e216c7a9f68285ef4f7d/PYu-RC_Group_51_RoHS_L_11.pdf, Supplier=TME, Supplier Part Number=RC0805FR-07470KL, Type="Thick Film Resistor"
R2 R18 R19 R20 R31 R36: library part "Resistor 10k 0805 1% 0.125W SMD E12", "Resistor: thick film; SMD; 0805; 10kΩ; 0,125W; ±1%; -55÷155°C", Manufacturer=YAGEO, Manufacturer Part Number=RC0805FR-0710KL, Power=0.125W, Tolerance=1%, Voltage max=150V, ComponentLink1Description=Datasheet, ComponentLink1URL=https://www.tme.eu/Document/666c7f44a829e216c7a9f68285ef4f7d/PYu-RC_Group_51_RoHS_L_11.pdf, Supplier=TME, Supplier Part Number=RC0805FR-0710KL, Type="Thick Film Resistor"
R3: library part "Resistor 1M 0805 1% 0.125W SMD E12", "Resistor: thick film; SMD; 0805; 1MΩ; 0,125W; ±1%; -55÷155°C", Manufacturer=YAGEO, Manufacturer Part Number=RC0805FR-071ML, Power=0.125W, Tolerance=1%, Voltage max=150V, ComponentLink1Description=Datasheet, ComponentLink1URL=https://www.tme.eu/Document/666c7f44a829e216c7a9f68285ef4f7d/PYu-RC_Group_51_RoHS_L_11.pdf, Supplier=TME, Supplier Part Number=RC0805FR-071ML, Type="Thick Film Resistor"
R4 R6: library part "Resistor 12k 0805 1% 0.125W SMD E12", "Resistor: thick film; SMD; 0805; 12kΩ; 0,125W; ±1%; -55÷155°C", Manufacturer=YAGEO, Manufacturer Part Number=RC0805FR-0712KL, Power=0.125W, Tolerance=1%, Voltage max=150V, ComponentLink1Description=Datasheet, ComponentLink1URL=https://www.tme.eu/Document/666c7f44a829e216c7a9f68285ef4f7d/PYu-RC_Group_51_RoHS_L_11.pdf, Supplier=TME, Supplier Part Number=RC0805FR-0712KL, Type="Thick Film Resistor"
R5 R9: library part "Resistor 33k 0805 1% 0.125W SMD E12", "Resistor: thick film; SMD; 0805; 33kΩ; 0,125W; ±1%; -55÷155°C", Manufacturer=YAGEO, Manufacturer Part Number=RC0805FR-0733KL, Power=0.125W, Tolerance=1%, Voltage max=150V, ComponentLink1Description=Datasheet, ComponentLink1URL=https://www.tme.eu/Document/666c7f44a829e216c7a9f68285ef4f7d/PYu-RC_Group_51_RoHS_L_11.pdf, Supplier=TME, Supplier Part Number=RC0805FR-0733KL, Type="Thick Film Resistor"
R7: library part "Resistor 1k 0805 1% 0.125W SMD E12", "Resistor: thick film; SMD; 0805; 1kΩ; 0,125W; ±1%; -55÷155°C", Manufacturer=YAGEO, Manufacturer Part Number=RC0805FR-071KL, Power=0.125W, Tolerance=1%, Voltage max=150V, ComponentLink1Description=Datasheet, ComponentLink1URL=https://www.tme.eu/Document/666c7f44a829e216c7a9f68285ef4f7d/PYu-RC_Group_51_RoHS_L_11.pdf, Supplier=TME, Supplier Part Number=RC0805FR-071KL, Type="Thick Film Resistor"
R8 R14 R17 R23: library part "Potentiometer PCB 100k THT Linear PTV09A", "Potentiometer: shaft; single turn; 100kΩ; 125mW; ±20%; THT; 6mm", Manufacturer="SR PASSIVES", Manufacturer Part Number=R9011-1-100K, Power=0.125W, Tolerance=20%, Voltage max=200V, ComponentLink1Description=Datasheet, ComponentLink1URL=https://www.tme.eu/Document/04583ac39161600e9684e4ace74c9dee/R9011.pdf, Shaft diameter=6mm, Shaft length=18mm, Supplier=TME, Supplier Part Number=R9011-1-100K, Type="Single Turn Potentiometer"
R10 R40 R41 R45: library part "Resistor 100k 0805 1% 0.125W SMD E12", "Resistor: thick film; SMD; 0805; 100kΩ; 0,125W; ±1%; -55÷155°C", Manufacturer=YAGEO, Manufacturer Part Number=RC0805FR-07100KL, Power=0.125W, Tolerance=1%, Voltage max=150V, ComponentLink1Description=Datasheet, ComponentLink1URL=https://www.tme.eu/Document/666c7f44a829e216c7a9f68285ef4f7d/PYu-RC_Group_51_RoHS_L_11.pdf, Supplier=TME, Supplier Part Number=RC0805FR-07100KL, Type="Thick Film Resistor"
R11 R12: library part "Resistor 4k7 0805 1% 0.125W SMD E12", "Resistor: thick film; SMD; 0805; 4.7kΩ; 0,125W; ±1%; -55÷155°C", Manufacturer=YAGEO, Manufacturer Part Number=RC0805FR-074K7L, Power=0.125W, Tolerance=1%, Voltage max=150V, ComponentLink1Description=Datasheet, ComponentLink1URL=https://www.tme.eu/Document/666c7f44a829e216c7a9f68285ef4f7d/PYu-RC_Group_51_RoHS_L_11.pdf, Supplier=TME, Supplier Part Number=RC0805FR-074K7L, Type="Thick Film Resistor"
R13 R16 R24 R25 R26 R27 R28 R29 R30 R50 R51 R52: library part "Resistor 22k 0805 1% 0.125W SMD E12", "Resistor: thick film; SMD; 0805; 22kΩ; 0,125W; ±1%; -55÷155°C", Manufacturer=YAGEO, Manufacturer Part Number=RC0805FR-0722KL, Power=0.125W, Tolerance=1%, Voltage max=150V, ComponentLink1Description=Datasheet, ComponentLink1URL=https://www.tme.eu/Document/666c7f44a829e216c7a9f68285ef4f7d/PYu-RC_Group_51_RoHS_L_11.pdf, Supplier=TME, Supplier Part Number=RC0805FR-0722KL, Type="Thick Film Resistor"
R15 R46 R48: library part "Resistor 220R 0805 1% 0.125W SMD E12", "Resistor: thick film; SMD; 0805; 220Ω; 0,125W; ±1%; -55÷155°C", Manufacturer=YAGEO, Manufacturer Part Number=RC0805FR-07220RL, Power=0.125W, Tolerance=1%, Voltage max=150V, ComponentLink1Description=Datasheet, ComponentLink1URL=https://www.tme.eu/Document/666c7f44a829e216c7a9f68285ef4f7d/PYu-RC_Group_51_RoHS_L_11.pdf, Supplier=TME, Supplier Part Number=RC0805FR-07220RL, Type="Thick Film Resistor"
R21: library part "Potentiometer 10k 25% 0.1W SMD Linear 3x3.5x1.55mm", "Potentiometer: mounting; single turn; 10kΩ; 100mW; SMD; ±25%; linear", Manufacturer="SR PASSIVES", Manufacturer Part Number=3305SMD-10K, Power=0.1W, Tolerance=25%, Voltage max=50V, ComponentLink1Description=Datasheet, ComponentLink1URL=https://www.tme.eu/Document/8c1ff45156797735249e0c74a685b1eb/SR_PASSIVES-3305SMD.pdf, Supplier=TME, Supplier Part Number=3305SMD-10K, Type="Single Turn Potentiometer"
R22 R34 R35 R42: library part "Resistor 47k 0805 1% 0.125W SMD E12", "Resistor: thick film; SMD; 0805; 47kΩ; 0,125W; ±1%; -55÷155°C", Manufacturer=YAGEO, Manufacturer Part Number=RC0805FR-0747KL, Power=0.125W, Tolerance=1%, Voltage max=150V, ComponentLink1Description=Datasheet, ComponentLink1URL=https://www.tme.eu/Document/666c7f44a829e216c7a9f68285ef4f7d/PYu-RC_Group_51_RoHS_L_11.pdf, Supplier=TME, Supplier Part Number=RC0805FR-0747KL, Type="Thick Film Resistor"
R32 R33: library part "Resistor 3K9 0805 1% 0.125W SMD E12", "Resistor: thick film; SMD; 0805; 3.9kΩ; 0,125W; ±1%; -55÷155°C", Manufacturer=YAGEO, Manufacturer Part Number=RC0805FR-073K9L, Power=0.125W, Tolerance=1%, Voltage max=150V, ComponentLink1Description=Datasheet, ComponentLink1URL=https://www.tme.eu/Document/666c7f44a829e216c7a9f68285ef4f7d/PYu-RC_Group_51_RoHS_L_11.pdf, Supplier=TME, Supplier Part Number=RC0805FR-073K9L, Type="Thick Film Resistor"
R37 R38: library part "Resistor 220k 0805 1% 0.125W SMD E12", "Resistor: thick film; SMD; 0805; 220kΩ; 0,125W; ±1%; -55÷155°C", Manufacturer=YAGEO, Manufacturer Part Number=RC0805FR-07220KL, Power=0.125W, Tolerance=1%, Voltage max=150V, ComponentLink1Description=Datasheet, ComponentLink1URL=https://www.tme.eu/Document/666c7f44a829e216c7a9f68285ef4f7d/PYu-RC_Group_51_RoHS_L_11.pdf, Supplier=TME, Supplier Part Number=RC0805FR-07220KL, Type="Thick Film Resistor"
R39: library part "Resistor 680R 0805 1% 0.125W SMD E12", "Resistor: thick film; SMD; 0805; 680Ω; 0,125W; ±1%; -55÷155°C", Manufacturer=YAGEO, Manufacturer Part Number=RC0805FR-07680RL, Power=0.125W, Tolerance=1%, Voltage max=150V, ComponentLink1Description=Datasheet, ComponentLink1URL=https://www.tme.eu/Document/666c7f44a829e216c7a9f68285ef4f7d/PYu-RC_Group_51_RoHS_L_11.pdf, Supplier=TME, Supplier Part Number=RC0805FR-07680RL, Type="Thick Film Resistor"
R43: library part "Resistor 10R 0805 1% 0.125W SMD E12", "Resistor: thick film; SMD; 0805; 10Ω; 0,125W; ±1%; -55÷155°C", Manufacturer=YAGEO, Manufacturer Part Number=RC0805FR-0710RL, Power=0.125W, Tolerance=1%, Voltage max=150V, ComponentLink1Description=Datasheet, ComponentLink1URL=https://www.tme.eu/Document/666c7f44a829e216c7a9f68285ef4f7d/PYu-RC_Group_51_RoHS_L_11.pdf, Supplier=TME, Supplier Part Number=RC0805FR-0710RL, Type="Thick Film Resistor"
R44 R49: library part "Resistor 100R 0805 1% 0.125W SMD E12", "Resistor: thick film; SMD; 0805; 10Ω; 0,125W; ±1%; -55÷155°C", Manufacturer=YAGEO, Manufacturer Part Number=RC0805FR-07100RL, Power=0.125W, Tolerance=1%, Voltage max=150V, ComponentLink1Description=Datasheet, ComponentLink1URL=https://www.tme.eu/Document/666c7f44a829e216c7a9f68285ef4f7d/PYu-RC_Group_51_RoHS_L_11.pdf, Supplier=TME, Supplier Part Number=RC0805FR-07100RL, Type="Thick Film Resistor"
R47: library part "Resistor 2k7 0805 1% 0.125W SMD E12", "Resistor: thick film; SMD; 0805; 2.7kΩ; 0,125W; ±1%; -55÷155°C", Manufacturer=YAGEO, Manufacturer Part Number=RC0805FR-072K7L, Power=0.125W, Tolerance=1%, Voltage max=150V, ComponentLink1Description=Datasheet, ComponentLink1URL=https://www.tme.eu/Document/666c7f44a829e216c7a9f68285ef4f7d/PYu-RC_Group_51_RoHS_L_11.pdf, Supplier=TME, Supplier Part Number=RC0805FR-072K7L, Type="Thick Film Resistor"
T1 T2 T3: library part "Transistor NPN 100mA 50V 0.225W BC847BLT1G", "Transistor: NPN; bipolar; 50V; 0.1A; 0.225W; SOT23", Current=0.1A, Manufacturer=ONSEMI, Manufacturer Part Number=BC847BLT1G, Power=0.225W, Voltage=50V, ComponentLink1Description=Datasheet, ComponentLink1URL=https://www.tme.eu/Document/2c8d510b744f532dcc70087b56c4cf86/BC84xALT1G.PDF, Supplier=TME, Supplier Part Number=BC847BLT1G, Type="NPN Bipolar"
U1: library part "IC Op-Amp Dual LM833DT SOIC-8", "Audio Amplifiers SOIC8 5-36V 15MHz LM833", Manufacturer=STMicroelectronics, Manufacturer Part Number=LM833DT, Voltage=5..30, Bandwidth="15 MHz", ComponentLink1Description=Datasheet, ComponentLink1URL=https://www.tme.eu/Document/4352da687a2f4b9e1ad18d9b547c2277/LM833DT.pdf, Supplier=TME, Supplier Part Number=LM833DT, Type="Operational Amplifier"
U2: library part "IC Gate NOT Schmitt 6CH SOIC14", "IC: digital; NOT; Ch: 6; IN: 1; CMOS; SMD; SOIC14; 3÷18VDC; -55÷125°C", Manufacturer="TEXAS INSTRUMENTS", Manufacturer Part Number=LM833DT, Voltage=5..30, Bandwidth="15 MHz", ComponentLink1Description=Datasheet, ComponentLink1URL=https://www.tme.eu/Document/4352da687a2f4b9e1ad18d9b547c2277/LM833DT.pdf, Supplier=TME, Supplier Part Number=LM833DT, Type="Operational Amplifier"
U3 U4: library part "IC SPDT Analog Switch SOT-23-6 SN74LVC1G3157DBVR", "IC: analog switch; SPDT; Ch: 1; SOT23-6; 1.65÷5.5VDC", Current=0.1A, Manufacturer="TEXAS INSTRUMENTS", Manufacturer Part Number=SN74LVC1G3157DBVR, Voltage=1.65..5.5, ComponentLink1Description=Datasheet, ComponentLink1URL=https://www.ti.com/lit/gpn/sn74lvc1g3157, Supplier=TME, Supplier Part Number=SN74LVC1G3157DBVR, Type="Analog Switch"
U5: library part "IC LDO ADJ 1A SOT223 SMD LDI1117", "IC: voltage regulator; LDO,linear,adjustable; 1.25÷13.65V; 1A", Current=1A, Input Voltage=1.25..13.65, Manufacturer="DIOTEC SEMICONDUCTOR", Manufacturer Part Number=LDI1117-ADH, Supplier Part Number=LDI1117-ADH-DIO, ComponentLink1Description=Datasheet, ComponentLink1URL=https://www.tme.eu/Document/084a5eb18462203f10c4803bc35208f3/ldi1117h.pdf, Supplier=TME, Type="LDO ADJ"
U6: library part "IC LDO 5V 0.1A SO8 SMD L78L05CD13TR", "IC: voltage regulator; linear,fixed; 5V; 0.1A; SO8; SMD; reel,tape", Current=0.1A, Input Voltage=7..20, Manufacturer=STMicroelectronics, Manufacturer Part Number=L78L05CD13TR, ComponentLink1Description=Datasheet, ComponentLink1URL=https://www.tme.eu/Document/556d763f6e3aa84c6e4929a4d8f94277/L78Lxx.pdf, Supplier=TME, Supplier Part Number=L78L05CD13TR, Type=LDO
V1: library part "Tube 12AX7 / ECC83 9pin NOVAL"

## Via types
v1: diameter 0.5, hole 0.3, Top Layer to Bottom Layer, 176 vias

## Nets (pads, with @x,y where several pads share a name; then routed paths per layer and width w, separated by ;. In a path a pad name is that pad's centre, name@x,y a point inside that pad or via, vN(x,y) a via of type N, cw(c..) or ccw(c..) an arc to the next point about the centre after c; other vN are vias at no path point)
+4V5: C23.2 R1.2 R27.1 R30.2 R49.1 | length 25.2
  Top Layer w0.3: R27.1 R30.2 C23.2 v1(65.525,71.45) ; v1(67.9,77.175) R49.1 70.675,81.65 71,81.975 R1.2
  Bottom Layer w0.3: v1(65.525,71.45) 67.525,71.45 67.9,71.825 v1(67.9,77.175)
+5V: C20.2 C21.2 C36.2 R32.2 R33.2 R45.2 U3.5 U4.5 U6.1 | length 142.5
  Top Layer w0.5: U6.1 9.122,20.723 9.122,18.577 C36.2 9.125,16.425 10.525,15.025 R33.2 ; v1(13.275,7.225) R32.2 ; v1(31.325,9.475) R45.2 ; v1(37.618,79.625) 37.618,82.442 38.451,83.275 C20.2 U4.5 ; v1(40.4,76.125) C21.2 U3.5
  Bottom Layer w0.5: v1(31.325,9.475) 29.075,7.225 v1(13.275,7.225) v1(13.275,15.025) 13.275,73.65 14.575,74.95 37.525,74.95 ; v1(37.618,79.625) 37.618,75.043 37.525,74.95 ; v1(40.4,76.125) 39.225,74.95 37.525,74.95
+6V3: C38.2 J11.1 J13.1 R43.2 U5.2 U5.4 | length 30
  Top Layer w0.5: J13.1 99.47,39.17 100.238,39.937 100.238,43.963 ; J11.1 98.2,44.7 99.5,44.7 100.238,43.963 ; R43.2 109.525,44.7 U5.4 108.825,44.7 C38.2 100.975,44.7 100.238,43.963
  Top Layer w1: U5.4 U5.2
+9V: C19.2 C22.2 C24.2 C35.2 D1.2 D2.1 J9.1 J10.1 R25.2 R26.2 R27.2 R28.2 R51.2 U1.8 U2.14 U5.3 U6.8 | length 345.7
  Top Layer w0.5: v1(8.125,28.475) C35.2 9.122,28.473 9.122,26.327 U6.8 ; v1(39.1,79.625) R28.2 ; v1(39.1,84.875) R25.2 ; R51.2 v1(50.6,75.175) ; J9.1 D1.2 C19.2 61.022,67.747 61.022,65.853 C22.2 R27.2 v1(62.325,67.15) ; R26.2 v1(68.775,74.975) ; U1.8 v1(77.4,72.625) ; v1(83.8,7.445) U2.14 ; J10.1 97.75,46.175 98.05,45.875 102,45.875 102.925,46.8 102.925,47.8 103.325,48.2 106.582,48.2 106.875,48.493 U5.3 106.625,51.5 104.825,51.5 C24.2 v1(104.725,52.6) ; D2.1 v1(104.625,5.825)
  Bottom Layer w0.5: v1(8.125,28.475) 8.125,79.775 10.6,82.25 39.1,82.25 ; v1(39.1,79.625) 39.1,82.25 ; v1(39.1,84.875) 39.1,82.25 ; v1(62.325,67.15) 62.325,70.425 ; v1(68.775,74.975) 68.775,70.45 68.8,70.425 ; 77.107,70.425 68.8,70.425 ; v1(77.4,72.625) 77.4,67.925 77.875,67.45 103.525,67.45 104.725,66.25 v1(104.725,52.6) 113.275,52.6 114.975,50.9 114.975,18.95 113.675,17.65 79.725,17.65 79.05,16.975 79.05,8.7 80.305,7.445 v1(83.8,7.445) 84.855,8.5 101.95,8.5 v1(104.625,5.825) ; 39.1,82.25 49.875,82.25 50.6,81.525 v1(50.6,75.175) 50.6,70.95 51.125,70.425 62.325,70.425 ; 62.325,70.425 68.8,70.425
+HV: C31.2 D8.2 R4.2 R6.2 | length 35.5
  Top Layer w0.5: D8.2 99.9,20.625 100.85,21.575 105.1,21.575 C31.2@105.3,21.575 ; R6.2 105.1,21.775 C31.2@105.3,21.575 ; R4.2 114.325,31.55 114.975,30.9 114.975,22.125 114.425,21.575 C31.2@105.3,21.575
EFFECT_INPUT: R15.1 R26.1 R50.2 U3.3 | length 45.9
  Top Layer w0.254: U3.3 47.925,77.075 48.725,76.275 48.725,66.275 51.425,63.575 68.125,63.575 69.225,64.675 69.225,71.852 69.002,72.075 R26.1 R50.2 R15.1
EFFECT_OUTPUT: R23.2 U4.3 | length 78.9
  Top Layer w0.254: U4.3 45.25,84.225 44.625,83.6 44.625,62.625 46.025,61.225 89.5,61.225 93.1,57.625 R23.2
GND: C2.1 C4.1 C11.1 C12.1 C13.1 C14.1 C15.1 C19.1 C20.1 C21.1 C22.1 C23.1 C24.1 C31.1 C34.1 C35.1 C36.1 C37.1 C38.1 D1.1 J1.1 J2.1 J9.2 J12.1 J25.2 R3.2 R13.1 R19.1 R20.1 R21.3 R22.1 R23.1 R24.1 R29.1 R30.1 R40.1 R41.1 R48.1 R50.1 R52.1 T1.2 T2.2 T3.2 U1.4 U2.7 U3.2 U4.2 U6.2 U6.3 U6.6 U6.7
  other v1: 35,5 77.5,5 80,5 82.5,5 35,7.5 77.5,7.5 77.5,10 112.5,10 115,10 77.5,12.5 35,15 77.5,15 112.5,15 115,15 5,17.5 35,17.5 77.5,17.5 5,20 108.5,20 111,20 113.5,20 97,21 5,22.5 5,25 5,27.5 102.1,27.5 5,30 5,32.5 10,32.5 16.5,32.5 100.401,32.844 113.785,33.919 110.271,34.079 5,35 10,35 16.5,35 113.785,36.419 5,37.5 10,37.5 16.5,37.5 113.785,38.919 5,40 10,40 16.5,40 113.785,41.419 103.5,41.5 106,41.5 108.5,41.5 5,42.5 16.5,42.5 5,45 16.5,45 5,47.5 16.5,47.5 5,50 16.5,50 5,52.5 82.482,54.5 5,55 10,55 17.5,55 35,55 37.5,55 56.4,55.725 5,57.5 10,57.5 17.5,57.5 35,57.5 37.5,57.5 107.5,57.5 58,59 62,59 79,59 83,59 5,60 10,60 17.5,60 35,60 37.5,60 107.5,60 112.5,60 5,62.5 10,62.5 17.5,62.5 35,62.5 37.5,62.5 107.5,62.5 112.5,62.5 5,65 10,65 107.5,65 112.5,65 5,67.5 10,67.5 107.5,67.5 112.5,67.5 64,68 5,70 10,70 107.5,70 112.5,70 5,72.5 10,72.5 53.465,72.496 55.965,72.496 107.5,72.5 112.5,72.5 63.5,73 66,73 5,75 10,75 107.5,75 112.5,75 79.373,76.465 5,77.5 10,77.5 107.5,77.5 112.5,77.5 79.373,78.965 5,80 10,80 107.5,80 112.5,80 5,82.5 107.5,82.5 112.5,82.5 10,85 12.5,85 70,85 72.5,85 12.5,87.5 70,87.5 72.5,87.5
INPUT_BUFFER: C16.1 U1.1 U1.2 | length 60.4
  Top Layer w0.254: C16.1 50.116,78.775 51.65,77.241 51.65,65.875 53.3,64.225 67.775,64.225 68.675,65.125 68.675,69.417 67.35,70.742 67.35,75.55 67.95,76.15 74.755,76.15 74.96,76.355 ; U1.2 74.96,76.355 ; U1.1 76.23,76.355 76.025,76.15 75.165,76.15 74.96,76.355
NetC1_1: C1.1 C2.2 R2.2 R3.1 | length 5.1
  Top Layer w0.3: C1.1 C2.2 R3.1 R2.2
NetC1_2: C1.2 R1.1 U1.3 | length 3.6
  Top Layer w0.254: U1.3 73.69,79.852 73.913,80.075 C1.2
NetC3_1: C3.1 C4.2 C12.2 R7.2 | length 6.3
  Top Layer w0.5: R7.2 105.1,29.75 105.2,29.85 C4.2 C12.2 C3.1
NetC3_2: C3.2 C7.2 R10.2 | length 103
  Top Layer w0.254: C7.2 v1(56.4,54.5) ; R10.2 v1(80.525,54.5)
  Top Layer w0.5: C3.2 v1(112.7,26.95)
  Bottom Layer w0.254: v1(56.4,54.5) v1(80.525,54.5) 80.5,54.525 80.5,62.1 83.325,64.925 100.75,64.925 102.623,63.052 102.623,52.777 104.8,50.6 110.775,50.6 112.7,48.675 v1(112.7,26.95)
NetC5_1: C5.1 C9.1 R8.2 R8.3 U1.7 | length 72.9
  Top Layer w0.3: v1(73.975,68.875) C9.1 C5.1 75.125,70.625 75.125,72.46 U1.7
  Bottom Layer w0.254: R8.2 26.4,53.775 27.125,54.5 ; R8.3 28.9,53.775 28.175,54.5 27.125,54.5 ; v1(73.975,68.875) 73.975,64.5 73.175,63.7 27.55,63.7 26.4,62.55 26.4,55.225 27.125,54.5
NetC5_2: C5.2 R8.1 R15.2 U1.6 | length 68.5
  Top Layer w0.254: v1(70.675,67.875) R15.2 73.05,68.875 73.375,69.2 C5.2 73.467,70.567 73.467,72.402 U1.6
  Bottom Layer w0.254: R8.1 23.9,63.65 25.6,65.35 69.675,65.35 70.675,66.35 v1(70.675,67.875)
NetC6_1: C6.1 R12.2 | length 2
  Top Layer w0.5: R12.2 105.1,25.653 105.2,25.553 106.3,25.553 106.5,25.353 C6.1
NetC6_2: C6.2 J4.1 R13.2 | length 23.7
  Top Layer w0.5: R13.2 C6.2 v1(110.5,25.1)
  Bottom Layer w0.5: J4.1 108.5,34.09 110.5,32.09 v1(110.5,25.1)
NetC7_1: C7.1 R17.3 | length 5.4
  Top Layer w0.254: R17.3@51.142,52 54.05,52 54.45,51.6 C7.1
NetC8_1: C8.1 C10.2 R14.2 R16.1 | length 18.1
  Top Layer w0.254: R16.1 C10.2 69.367,53.5 R14.2 72.367,53.5 C8.1@78.634,53.5
NetC8_2: C8.2 R10.1 R14.3 | length 7.3
  Top Layer w0.254: R14.3 76.275,52 76.675,51.6 C8.2 R10.1
NetC9_2: C9.2 R18.1 | length 1.9
  Top Layer w0.254: C9.2 R18.1
NetC10_1: C10.1 R14.1 R20.2 | length 7.3
  Top Layer w0.254: R20.2 C10.1 65.05,51.6 65.45,52 R14.1@68.358,52
NetC11_2: C11.2 R17.1 | length 5.4
  Top Layer w0.254: C11.2 42.825,51.6 43.225,52 R17.1
NetC13_2: C13.2 C14.2 C15.2 J6.1 J8.1 R21.1 R21.2 R22.2 | length 24
  Top Layer w0.254: R22.2@99.99,29.01 R22.2
  Top Layer w0.5: R22.2@99.99,29.01 J8.1 96.075,30.685 96.075,34.955 J6.1 100.72,36.63 100.72,36.58 101.7,35.6 R21.1 C14.2 C13.2 C15.2
NetC16_2: C16.2 R24.2 R28.1 U3.4 | length 5.6
  Top Layer w0.254: R28.1 42,77.425 42.201,77.224 43.076,77.224 43.225,77.075 U3.4 C16.2
NetC17_1: C17.1 R25.1 R29.2 U4.4 | length 5.5
  Top Layer w0.254: R29.2 R25.1 42,84.575 42.223,84.352 42.623,84.352 42.625,84.35 U4.4@43.323,84.35 ; C17.1 43.3,84.373 U4.4@43.323,84.35 ; U4.4 43.425,84.35 U4.4@43.323,84.35
NetC18_1: C18.1 R23.3 | length 5.3
  Top Layer w0.254: R23.3 98.55,52 99.271,51.279 C18.1
NetC18_2: C18.2 R16.2 R17.2 | length 58.7
  Top Layer w0.254: R17.2 48.633,55.308 50.025,56.7 R16.2 84,56.7 84.5,56.2 84.5,50.525 85.031,49.994 C18.2
NetC25_1: C25.1 R47.2 U2.2 U2.3 | length 22.5
  Top Layer w0.5: v1(86.05,6.85) R47.2 87.5,9.275 88.11,9.885 U2.2 91.31,9.885 91.6,10.175 91.6,10.865 91.31,11.155 U2.3 ; v1(94.7,4.375) C25.1
  Bottom Layer w0.5: v1(86.05,6.85) 90.825,6.85 93.3,4.375 v1(94.7,4.375)
NetC25_2: C25.2 D2.2 D3.1 | length 4.5
  Top Layer w0.5: C25.2 D2.2 D3.1
NetC26_1: C26.1 U2.4 U2.5 | length 30.7
  Top Layer w0.5: U2.4 91.675,12.425 91.89,12.64 v1(91.89,13.695) U2.5 ; v1(108.5,6.575) C26.1
  Bottom Layer w0.5: v1(91.89,13.695) 92.47,14.275 104.05,14.275 104.925,13.4 104.925,8.075 106.425,6.575 v1(108.5,6.575)
NetC26_2: C26.2 D3.2 D4.1 | length 4.5
  Top Layer w0.5: D4.1 D3.2 C26.2
NetC27_1: C27.1 U2.6 U2.9 | length 15.2
  Top Layer w0.5: U2.9 U2.6 93.06,14.965 93.425,14.6 93.425,10.65 93.85,10.225 C27.1
NetC27_2: C27.2 D4.2 D5.1 | length 4.5
  Top Layer w0.5: C27.2 D4.2 D5.1
NetC28_1: C28.1 U2.8 U2.11 | length 41.1
  Top Layer w0.5: U2.11 81.575,12.425 81.31,12.69 v1(81.31,16.235) U2.8 ; v1(108.5,10.975) C28.1
  Bottom Layer w0.5: v1(81.31,16.235) 106.065,16.235 108.5,13.8 v1(108.5,10.975)
NetC28_2: C28.2 D5.2 D6.1 | length 4.5
  Top Layer w0.5: D6.1 D5.2 C28.2
NetC29_1: C29.1 U2.10 U2.13 | length 21.2
  Top Layer w0.5: U2.13 v1(86.29,9.885) 86.29,13.43 86.025,13.695 U2.10 ; v1(94.7,13.175) C29.1
  Bottom Layer w0.5: v1(86.29,9.885) 93.685,9.885 94.7,10.9 v1(94.7,13.175)
NetC29_2: C29.2 D6.2 D7.1 | length 4.5
  Top Layer w0.5: C29.2 D6.2 D7.1
NetC30_1: C30.1 U2.12 | length 45.5
  Top Layer w0.5: v1(81.31,11.155) U2.12 ; v1(108.5,15.375) C30.1
  Bottom Layer w0.5: v1(81.31,11.155) 85.305,15.15 104.8,15.15 106.375,13.575 106.375,9.9 107.2,9.075 109.55,9.075 109.85,9.375 109.85,14.025 v1(108.5,15.375)
NetC30_2: C30.2 D7.2 D8.1 | length 4.5
  Top Layer w0.5: D8.1 D7.2 C30.2
NetC32_1: C32.1 D9.2 R37.1 | length 4
  Top Layer w0.254: R37.1 D9.2 27.675,10.025 C32.1
NetC32_2: C32.2 C33.1 C37.2 J25.1 R45.1 | length 8.1
  Top Layer w0.254: C32.2 C33.1 29.725,12.152 29.948,12.375 R45.1 C37.2 35.77,12.375 J25.1
NetC33_2: C33.2 D10.2 R38.1 | length 4
  Top Layer w0.254: R38.1 D10.2 27.675,12.225 C33.2
NetC34_2: C34.2 R47.1 U2.1 | length 3.7
  Top Layer w0.5: C34.2 R47.1 U2.1
NetD9_1: D9.1 R35.1 R40.2 T1.1 | length 7.9
  Top Layer w0.254: R35.1 D9.1@22.075,9.875 ; T1.1 21.425,6.275 21.875,6.725 R40.2 21.875,9.675 D9.1@22.075,9.875 ; D9.1 D9.1@22.075,9.875
NetD10_1: D10.1 R34.2 R41.2 T2.1 | length 6.5
  Top Layer w0.254: R34.2 D10.1@22.075,12.375 ; T2.1 21.675,14.075 R41.2 21.875,12.575 D10.1@22.075,12.375 ; D10.1 D10.1@22.075,12.375
NetJ2_3: J2.3 R2.1 | length 17.6
  Top Layer w0.254: R2.1 81,85.175 81.625,84.55 81.625,73.25 82.825,72.05 J2.3
NetJ3_1: J3.1 R5.1 R7.1 | length 7.4
  Top Layer w0.5: J3.1 R5.1 R7.1
NetJ5_1: J5.1 R9.1 R11.1 | length 4.2
  Top Layer w0.5: J5.1 97.77,23.95 R9.1 R11.1
NetJ7_1: J7.1 R18.2 R19.2 | length 89.7
  Top Layer w0.254: R19.2 R18.2 99.05,68.875 101.275,66.65 v1(101.275,60.675)
  Bottom Layer w0.254: J7.1 104.48,26.47 107.025,23.925 111.4,23.925 111.625,24.15 111.625,44.95 106.7,49.875 104.6,49.875 101.275,53.2 v1(101.275,60.675)
NetJ10_2: J10.2 R39.2 | length 2.9
  Top Layer w0.5: J10.2 100.29,47.658 101.25,48.618 101.25,49.6 101.15,49.7 R39.2
NetJ14_1: J14.1 V1.1 | length 8.1
  Top Layer w0.5: V1.1 86.587,23.93 J14.1
NetJ15_1: J15.1 V1.6 | length 31
  Top Layer w0.5: V1.6 74.962,40.201 74.962,32.456 76.868,30.55 82.85,30.55 85.5,33.2 90.65,33.2 J15.1
NetJ16_1: J16.1 V1.4 | length 8
  Bottom Layer w0.5: V1.4 87.21,42.585 88.775,44.15 J16.1
NetJ17_1: J17.1 V1.2 | length 7.5
  Top Layer w0.5: V1.2 88.736,27.214 89.48,26.47 J17.1
NetJ18_1: J18.1 V1.7 | length 26.1
  Top Layer w0.5: v1(84.325,37.35) 84.325,35.3 85.15,34.475 91.815,34.475 J18.1
  Bottom Layer w0.5: V1.7 68.772,37.342 84.317,37.342 v1(84.325,37.35)
NetJ19_1: J19.1 V1.9 | length 50.2
  Top Layer w0.5: V1.9 72.578,37.322 69.925,39.975 69.925,43.55 73.475,47.1 v1(79.4,47.1)
  Bottom Layer w0.5: v1(79.4,47.1) 80.75,47.1 81.85,46 81.85,40.875 83.05,39.675 85.675,39.675 88.161,42.161 91.738,42.161 91.75,42.15 J19.1
NetJ20_1: J20.1 V1.5 | length 20
  Bottom Layer w0.5: V1.5 78.75,40.235 80.385,38.6 86.35,38.6 88.25,40.5 90.87,40.5 J20.1
NetJ21_1: J21.1 V1.3 | length 17.3
  Bottom Layer w0.5: V1.3 85,33.599 85,29.55 86.091,28.459 91.457,28.459 ; 91.458,28.46 91.75,28.46 J21.1
NetJ22_1: J22.1 V1.8 | length 37.1
  Top Layer w0.5: V1.8 68.764,25.061 71.5,22.325 77.091,22.325 v1(86.24,31.473)
  Bottom Layer w0.5: v1(86.24,31.473) 86.24,32.815 86.975,33.55 89.32,33.55 J22.1
NetJ23_1: J23.1 J24.1 | length 16.2
  Top Layer w0.5: J23.1 78.75,39.3 81.7,42.25 81.7,45.1 82.525,45.925 86.485,45.925 J24.1
NetJ23_2: J23.2 J24.2 | length 21.3
  Top Layer w0.5: J23.2 81.295,32.82 81.875,33.4 81.875,38.225 83.7,40.05 87.65,40.05 89.1,41.5 J24.2
NetR4_1: R4.1 R5.2 | length 1.3
  Top Layer w0.5: R5.2 R4.1
NetR6_1: R6.1 R9.2 | length 1.3
  Top Layer w0.5: R9.2 R6.1
NetR11_2: R11.2 R12.1 | length 1.3
  Top Layer w0.5: R11.2 R12.1
NetR31_1: R31.1 R32.1 R34.1 R37.2 T1.3 | length 19.8
  Top Layer w0.254: R32.1 T1.3 ; R31.1 R34.1 17.475,12.075 18.475,11.075 18.475,7.675 18.025,7.225 T1.3 ; R37.2 25.625,5.35 25.2,4.925 18.625,4.925 17.725,5.825 T1.3
NetR33_1: R33.1 R35.2 R36.1 R38.2 T2.3 | length 17
  Top Layer w0.254: R35.2 R36.1 16.175,10.175 15.225,11.125 15.225,13.775 16.175,14.725 R33.1 T2.3 21.086,15.025 21.936,15.875 R38.2
NetR39_1: R39.1 T3.3 | length 2.4
  Top Layer w0.254: T3.3 T3.3@100.925,53.9
  Top Layer w0.5: R39.1 T3.3@100.925,53.9
NetR42_2: R42.2 T3.1 | length 5.8
  Top Layer w0.254: R42.2 103.9,56.6 104.456,56.044 104.456,53.681 103.775,53 T3.1
NetR43_1: R43.1 R44.2 | length 3.1
  Top Layer w0.5: R43.1 R44.2
NetR44_1: R44.1 R46.2 U5.1 | length 3.6
  Top Layer w0.5: U5.1 111.825,51.6 R44.1 R46.2
NetR46_1: R46.1 R48.2 | length 1.9
  Top Layer w0.5: R48.2 R46.1
NetR49_2: R49.2 U1.5 | length 4.1
  Top Layer w0.254: R49.2 71.9,75.275 72.42,74.755 U1.5
NetR51_1: R51.1 R52.2 U3.1 U4.1 | length 12.9
  Top Layer w0.254: U3.1 R51.1 v1(47.7,73.875) ; U4.1 47.675,82.325 R52.2 v1(47.7,81.05)
  Bottom Layer w0.254: v1(47.7,73.875) v1(47.7,81.05)
OUTPUT_BUFFER: C17.2 J1.3 | length 43.7
  Top Layer w0.254: J1.3 22.95,72.05 24.7,73.8 24.7,86.5 26.875,88.675 44.7,88.675 45.2,88.175 C17.2
SET: R31.2 R36.2 R42.1 U3.6 U4.6 | length 166.9